# Altium PCB PCB2.PcbDoc
Units mm, origin at the board's own origin, x right, y up, seen from the top; angles counter-clockwise.
Board outline 150 x 75 mm, 2 copper layers (Top Layer, Bottom Layer); 21 components, 19 nets, 96 pads, 43 vias.
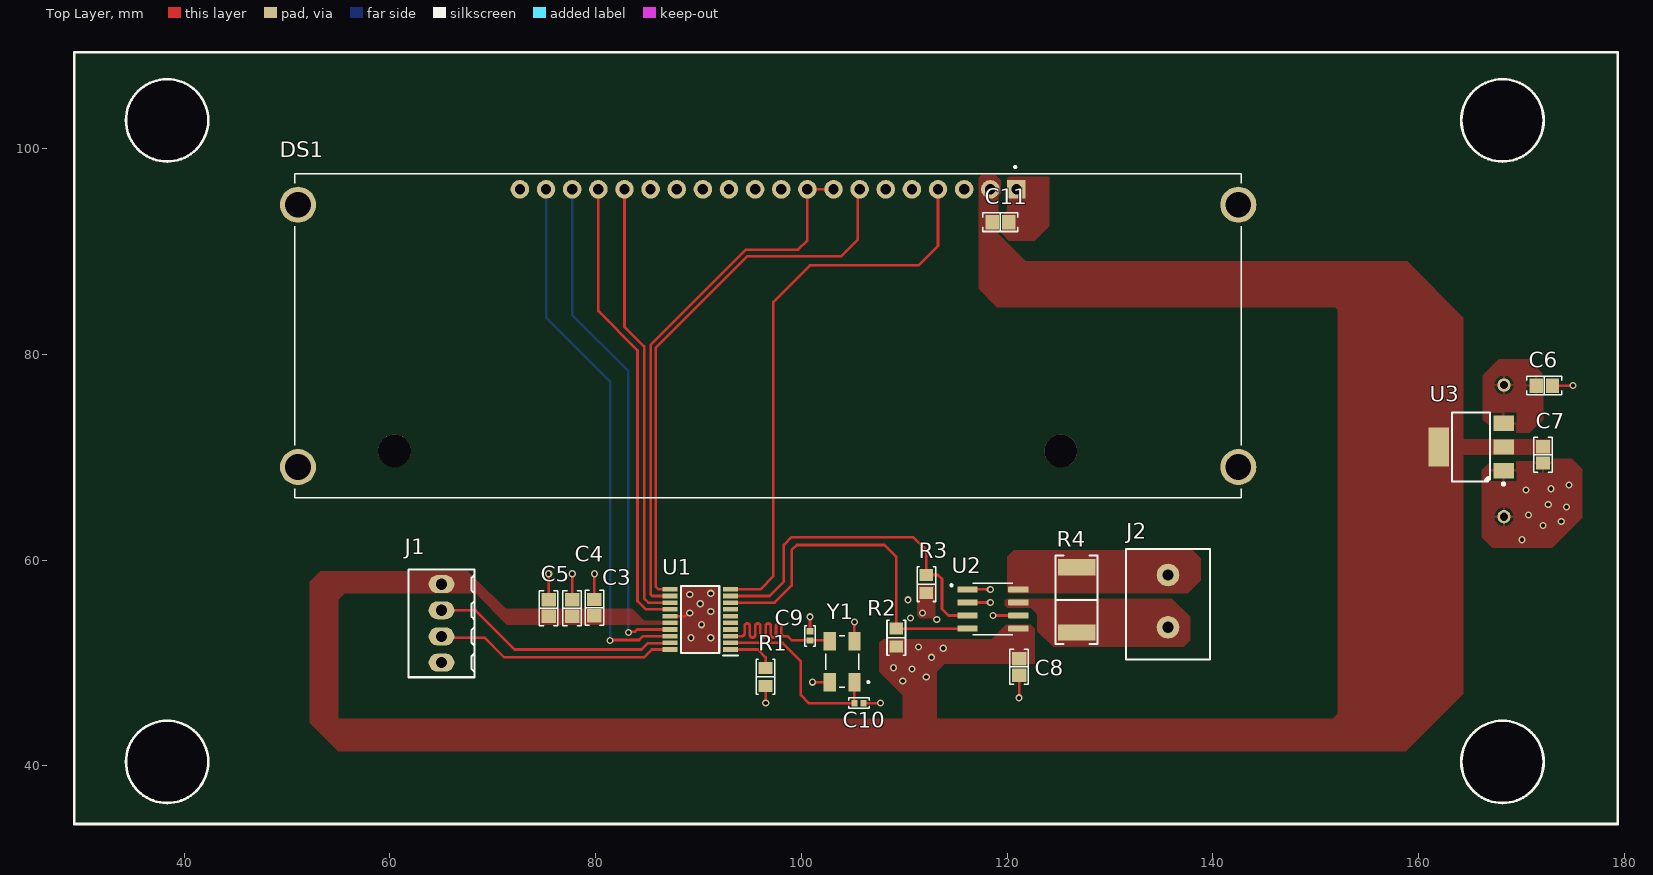
[diagram p0: Top Layer view]
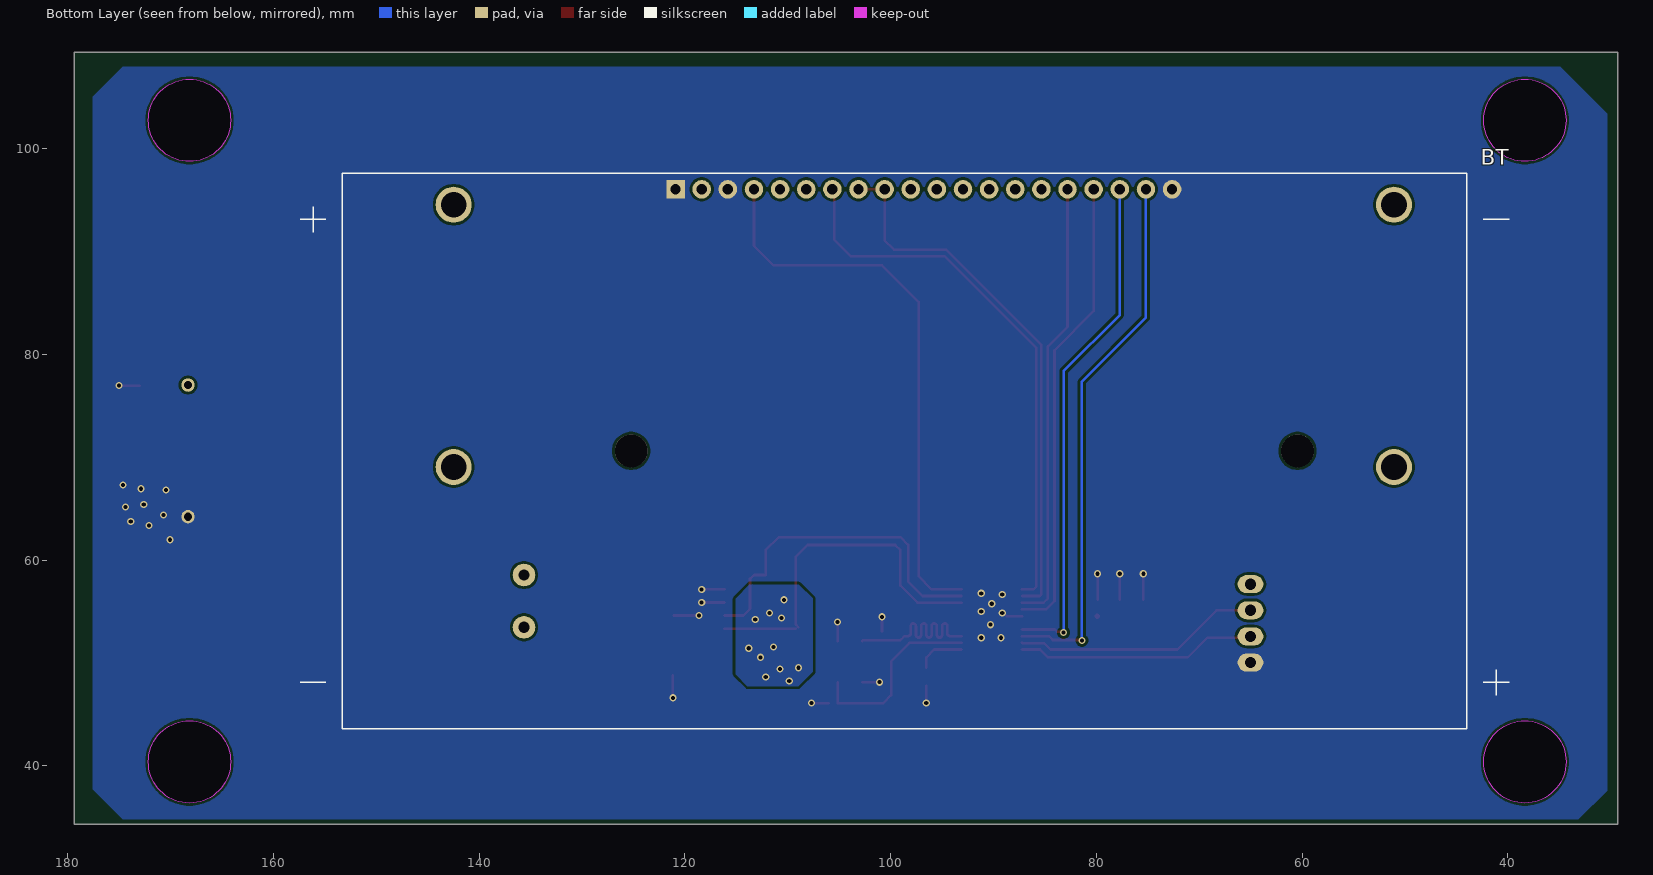
[diagram p1: Bottom Layer view, seen from below]
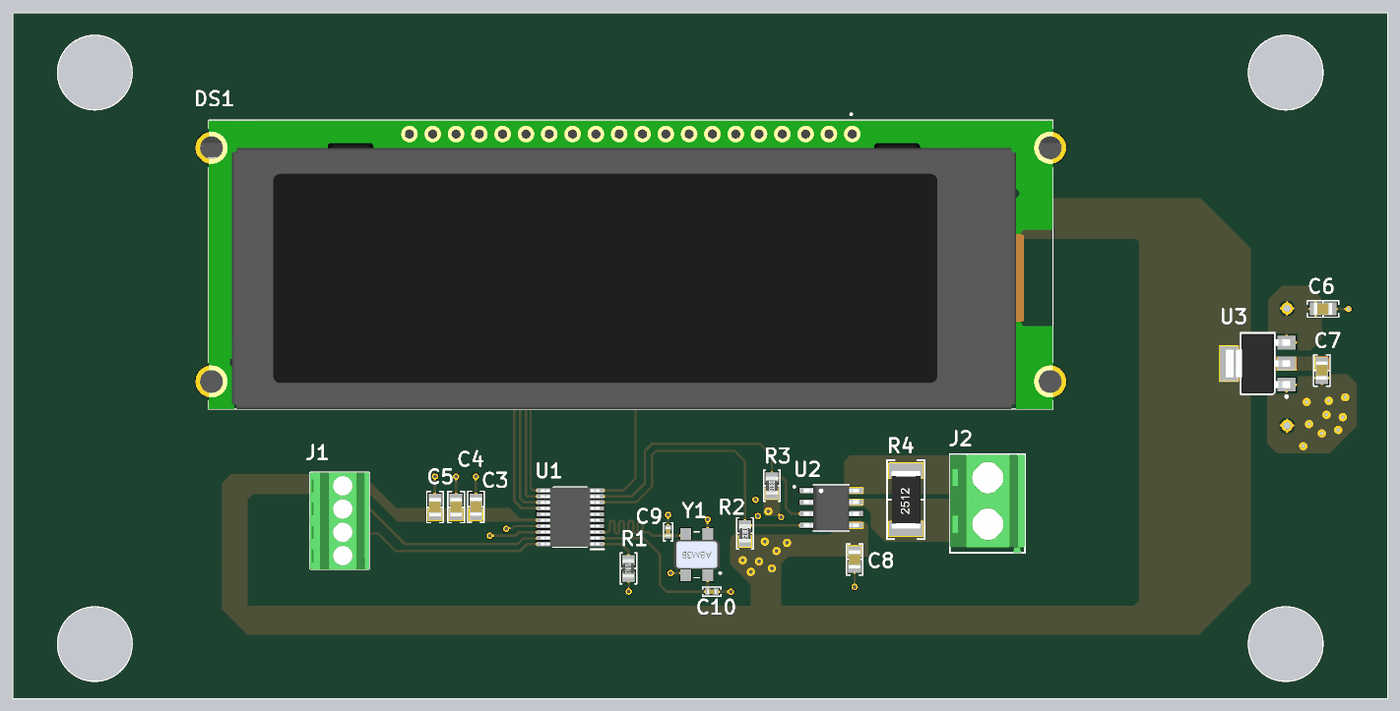
[diagram p2: 3D render of the assembled board from above, using the file's embedded part models]

## Layer stack, top to bottom
Top Solder: solder mask 0.0102, Solder Resist, Dk 3.5
Top Layer: signal copper 0.0356
Dielectric 1: dielectric 0.32, FR-4, Dk 4.8
Bottom Layer: signal copper 0.0356
Bottom Solder: solder mask 0.0102, Solder Resist, Dk 3.5

## Board outline
29.337,34.347 29.337,109.347 179.337,109.347 179.337,34.347
cut-out: 164.147,102.743 ccw(c168.147,102.743) 168.147,98.743 ccw(c168.147,102.743) 172.147,102.743 ccw(c168.147,102.743) 168.147,106.743 ccw(c168.147,102.743)
cut-out: 164.147,40.386 ccw(c168.147,40.386) 168.147,36.386 ccw(c168.147,40.386) 172.147,40.386 ccw(c168.147,40.386) 168.147,44.386 ccw(c168.147,40.386)
cut-out: 34.353,40.386 ccw(c38.353,40.386) 38.353,36.386 ccw(c38.353,40.386) 42.353,40.386 ccw(c38.353,40.386) 38.353,44.386 ccw(c38.353,40.386)
cut-out: 34.353,102.743 ccw(c38.353,102.743) 38.353,98.743 ccw(c38.353,102.743) 42.353,102.743 ccw(c38.353,102.743) 38.353,106.743 ccw(c38.353,102.743)

## Design rules (kind name [scope] priority, off if disabled: settings)
Clearance [All] p1: gap=0.254 ignorepadtopadclearanceinfootprint=TRUE
Height [All] p1: minheight=0 maxheight=100 prefheight=12.7
HoleSize [All] p1: absolutevalues=TRUE maxlimit=3.5 minlimit=0.025 maxpercent=80.000 minpercent=20.000
MinimumSolderMaskSliver [All] p1: minsoldermaskwidth=0.01
PolygonConnect [All] p1: connectstyle=Direct reliefconductorwidth=0.254 reliefentries=4 polygonreliefangle="90 Angle" airgapwidth=0.254
RoutingVias [All] p1: holewidth=0.711 width=1.27 viastyle="Through Hole" minholewidth=0.4 minwidth=0.7 maxholewidth=0.711 maxwidth=1.27
SilkToSilkClearance [All] p1: silktosilkclearance=0.01
SilkToSolderMaskClearance [IsPad] p1: minsilkscreentomaskgap=0 clearancetoexposedcopper=TRUE
SolderMaskExpansion [All] p1: expansion=0.102 istentingtop=FALSE
SupplyNets "Schematic Supply Nets_3" [InNet('3V3')] p1: voltage=0.000
SupplyNets "Schematic Supply Nets_2" [InNet('GND')] p2: voltage=0.000
SupplyNets "Schematic Supply Nets_1" [InNet('9V')] p3: voltage=0.000
Width [All] p1: maxlimit=1 minlimit=0.254 preferedwidth=0.254
25 further rules are at their usual default settings.

## Components (designator, comment, footprint, x,y, rotation, side; value= is the part's Value field where it differs from the comment)
BT "BH24CSF" BAT_BH24CSF 98.642,70.612 r0 bottom
C3 "10000 pF" "CAP 0805_2012" 79.883,55.372 r270 top
C4 "0.1 µF" "CAP 0805_2012" 77.724,55.334 r270 top
C5 "4.7 µF" "CAP 0805_2012" 75.438,55.334 r270 top
C6 "0.1 µF" "CAP 0805_2012" 172.212,76.962 r180 top
C7 "10 µF" "CAP 0805_2012" 172.085,70.231 r90 top
C8 "0.1 µF" "CAP 0805_2012" 121.158,49.619 r90 top
C9 "12 pF" "CAP 0402_1005" 100.838,52.637 r270 top
C10 "12 pF" "CAP 0402_1005" 105.596,46.101 r180 top
C11 "0.1 µF" "CAP 0805_2012" 119.342,92.837 r180 top
DS1 "NHD-0420CW-AB3" LCD_NHD-0420CW-AB3 96.774,81.788 r0 top
J1 "282834-4" "TE 282834-4" 65.024,53.848 r270 top
J2 "282837-2" "TE 282837-2" 135.636,56.007 r270 top
R1 "10k Ohms" "RES 0805_2012" 96.52,48.641 r90 top value="0 Ohms"
R2 "10k" "RES 0805_2012" 109.22,52.465 r270 top
R3 "10k" "RES 0805_2012" 112.141,57.672 r270 top
R4 "100 mOhms" "RES 2512_6432" 126.746,56.134 r90 top
U1 "STM32F030F4P6" TSSOP-20 90.17,54.229 r180 top
U2 "INA219BID" SOIC-8 118.618,55.245 r0 top
U3 "LD1117S33TR" "ST SOT-223" 165.1,70.993 r180 top
Y1 "ABM3B-8.000MHZ-D2Y-T" XTAL_ABM3B-8.000MHZ-D2Y-T 103.956,50.133 r180 top

## Footprints (in the part's own frame and the unit in brackets; to place one, negate y for a bottom-side part, rotate by r counter-clockwise, add the part's x,y. Pads: shape width x height; smd on the part's side, far side on the other; paste and mask are expansions set on the pad)
BAT_BH24CSF [mm]
  round 1.308 hole 0.8: N(69.65,6.4) P(69.65,-6.4)
  round 3.18 hole 3.18 unplated: ""(-38.19,0) ""(26.58,0)
  silkscreen extent -58.75,-26.99 58.75,26.99, body extent -54.65,-26.99 58.05,26.99, height 26.68
"CAP 0402_1005" [mm] "Chip Capacitor, 2-Leads, Body 1.02x0.51mm, IPC Medium Density"
  rect 0.6x0.64 smd: 1(-0.44,0) 2(0.44,0)
  silkscreen extent -1,-0.5 1,0.5, body extent -0.5,-0.26 0.5,0.26, height 0.52
"CAP 0805_2012" [mm] "Chip Capacitor, 2-Leads, Body 2.00x1.20mm, IPC Medium Density"
  rect 1.3x1.4 smd: 1(-0.8,0) 2(0.8,0)
  silkscreen extent -1.7,-0.9 1.7,0.9, body extent -1,-0.64 1,0.64, height 1.26
LCD_NHD-0420CW-AB3 [mm]
  rect 1.8x1.8 / inner round 1.8 / far side rect 1.8x1.8 hole 1: 1(24.13,14.25)
  round 1.8 hole 1: 2(21.59,14.25) 3(19.05,14.25) 4(16.51,14.25) 5(13.97,14.25) 6(11.43,14.25) 7(8.89,14.25) 8(6.35,14.25) 9(3.81,14.25) 10(1.27,14.25) 11(-1.27,14.25) 12(-3.81,14.25) 13(-6.35,14.25) 14(-8.89,14.25) 15(-11.43,14.25) 16(-13.97,14.25) 17(-16.51,14.25) 18(-19.05,14.25) 19(-21.59,14.25) 20(-24.13,14.25)
  round 3.5 hole 2.5: SH1(-45.7,12.75) SH2(45.7,12.75) SH3(45.7,-12.75) SH4(-45.7,-12.75)
  silkscreen extent -46,-15.75 46,16.51, body extent -46,-15.75 46,15.75, height 8.8
"RES 0805_2012" [mm] "Chip Resistor, 2-Leads, Body 2.00x1.25mm, IPC Medium Density"
  rect 1.15x1.35 smd: 1(-0.875,0) 2(0.875,0)
  silkscreen extent -1.7,-0.9 1.7,0.9, body extent -1,-0.62 1,0.63, height 0.6
"RES 2512_6432" [mm] "Chip Resistor, 2-Leads, Body 6.30x3.15mm, IPC Medium Density"
  rect 1.6x3.65 smd: 1(-3.175,0) 2(3.175,0)
  silkscreen extent -4.3,-2.05 4.3,2.05, body extent -3.15,-1.57 3.15,1.57, height 0.7
SOIC-8 [mm]
  rrect25% 1.97x0.6 smd: 1(-2.47,1.905) 2(-2.47,0.635) 3(-2.47,-0.635) 4(-2.47,-1.905) 5(2.47,-1.905) 6(2.47,-0.635) 7(2.47,0.635) 8(2.47,1.905)
  silkscreen extent -4.14,-2.52 1.95,2.52, body extent -3,-2.45 3,2.45, height 1.75
"ST SOT-223" [mm] "SOT223, 4-Leads, Body 6.50x7.00mm (avg), Pitch 2.30mm, IPC Medium Density"
  rect 2x1.5 smd: 1(-3.15,2.3) 2(-3.15,0) 3(-3.15,-2.3)
  rect 2x3.8 smd: 4(3.15,0)
  silkscreen extent -3.27,-3.35 1.85,3.72, body extent -3.52,-3.25 3.5,3.25, height 1.8
"TE 282834-4" [mm]
  oval 1.75x2.5 hole 1.1: 1(-3.81,0) 2(-1.27,0) 3(1.27,0) 4(3.81,0)
  silkscreen extent -5.24,-3.2 5.24,3.2, body extent -5.31,-3.25 5.31,3.25, height 10
"TE 282837-2" [mm] "Wire to Board Terminal Block Horizontal with Board, 2 Postions, Body 10.76x8.2 mm, Pitch 5.08mm"
  round 2.2 hole 1.1: 1(-2.54,0) 2(2.54,0)
  silkscreen extent -5.08,-4.1 5.68,4.1, body extent -5.08,-4.1 5.68,4.1, height 10.3
TSSOP-20 [mm]
  rect 1.475x0.45 smd: 1(-2.938,2.925) 2(-2.938,2.275) 3(-2.938,1.625) 4(-2.938,0.975) 5(-2.938,0.325) 6(-2.938,-0.325) 7(-2.938,-0.975) 8(-2.938,-1.625) 9(-2.938,-2.275) 10(-2.938,-2.925) 11(2.938,-2.925) 12(2.938,-2.275) 13(2.938,-1.625) 14(2.938,-0.975) 15(2.938,-0.325) 16(2.938,0.325) 17(2.938,0.975) 18(2.938,1.625) 19(2.938,2.275) 20(2.938,2.925)
  silkscreen extent -3.67,-3.25 1.85,3.5, body extent -3.2,-3.25 3.2,3.25, height 1.23
XTAL_ABM3B-8.000MHZ-D2Y-T [mm]
  rect 1.2x1.8 smd: 1(-1.2,2) 2(-1.2,-2) 3(1.2,-2) 4(1.2,2)
  silkscreen extent -2.65,-2.5 1.6,2.5, body extent -2.5,-1.6 2.5,1.6, height 1.1

## Part data
BT: "BATTERY HOLDER C 4 CELL 9V SNAP", Package=None, Availability=Unavailable, MF=MPD, MP=BH24CSF, Price=None, SnapEDA_Link=https://www.snapeda.com/parts/BH24CSF/MPD/view-part/4389082/?ref=snap
C3: library part C0805X103K1RAC3316, "CAP CER 0805 10NF 100V X7R", Device Package="0805 (2012 Metric)", Manufacturer=KEMET, Operating Temperature="-55°C ~ 125°C", Ratings=AEC-Q200, Supplier Part Number 1=399-C0805X103K1RAC3316CT-ND, Temperature Coefficient=X7R, Tolerance=±10%, Voltage - Rated=100V, Applications="Automotive, Boardflex Sensitive", Capacitance="10000 pF", ComponentLink1Description=Datasheet, ComponentLink1URL=https://api.kemet.com/component-edge/download/datasheet/C0805X103K1RAC3316.pdf, ComponentLink2Description="DigiKey Link", ComponentLink2URL=https://www.digikey.com/en/products/detail/kemet/C0805X103K1RAC3316/10315780, Features="Soft Termination", LastUpdated="9.02.2024 20:16:09", Lifecycle Status=Active, Minimum Order=1, Mounting Type="Surface Mount, MLCC", Package / Case="0805 (2012 Metric)", Packaging=TapeAndReel, Part Number=C0805X103K1RAC3316, Part Status=Active, PartId=2565, Price=0.02, Series="SMD Auto X7R VW80808", Size / Dimension="0.079\" L x 0.049\" W (2.00mm x 1.25mm)", Supplier 1=DigiKey, Thickness (Max)="0.039\" (0.98mm)"
C4 C6 C8 C11: library part C0805C104M5RACAUTO, "CAP CER 0.1UF 50V X7R 0805", Device Package="0805 (2012 Metric)", Manufacturer=KEMET, Operating Temperature="-55°C ~ 125°C", Ratings=AEC-Q200, Supplier Part Number 1=399-12977-1-ND, Temperature Coefficient=X7R, Tolerance=±20%, Voltage - Rated=50V, Applications="Automotive, Bypass, Decoupling", Capacitance="0.1 µF", ComponentLink1Description=Datasheet, ComponentLink1URL=https://api.kemet.com/component-edge/download/datasheet/C0805C104M5RACAUTO.pdf, ComponentLink2Description="DigiKey Link", ComponentLink2URL=https://www.digikey.com/en/products/detail/kemet/C0805C104M5RACAUTO/5762233, LastUpdated="9.02.2024 20:16:09", Lifecycle Status=Active, Minimum Order=1, Mounting Type="Surface Mount, MLCC", Package / Case="0805 (2012 Metric)", Packaging=TapeAndReel, Part Number=C0805C104M5RACAUTO, Part Status=Active, PartId=2568, Price=0.01, Series="SMD Auto X7R", Size / Dimension="0.079\" L x 0.049\" W (2.00mm x 1.25mm)", Supplier 1=DigiKey, Thickness (Max)="0.035\" (0.88mm)"
C5: library part C0805X475J9RACAUTO, "CAP CER 4.7UF 6.3V X7R 0805", Device Package="0805 (2012 Metric)", Manufacturer=KEMET, Operating Temperature="-55°C ~ 125°C", Ratings=AEC-Q200, Supplier Part Number 1=399-15727-1-ND, Temperature Coefficient=X7R, Tolerance=±5%, Voltage - Rated=6.3V, Applications="Automotive, Boardflex Sensitive", Capacitance="4.7 µF", ComponentLink1Description=Datasheet, ComponentLink1URL=https://api.kemet.com/component-edge/download/datasheet/C0805X475J9RACAUTO.pdf, ComponentLink2Description="DigiKey Link", ComponentLink2URL=https://www.digikey.com/en/products/detail/kemet/C0805X475J9RACAUTO/7427557, Features="Soft Termination", LastUpdated="9.02.2024 20:16:08", Lifecycle Status=Active, Minimum Order=1, Mounting Type="Surface Mount, MLCC", Package / Case="0805 (2012 Metric)", Packaging=TapeAndReel, Part Number=C0805X475J9RACAUTO, Part Status=Active, PartId=2889, Price=0.20, Series="SMD Auto X7R Flex", Size / Dimension="0.079\" L x 0.049\" W (2.00mm x 1.25mm)", Supplier 1=DigiKey, Thickness (Max)="0.057\" (1.45mm)"
C7: library part CL21Y106KPQVPNE, "CAP CER 10UF 10V X7S 0805", Device Package="0805 (2012 Metric)", Manufacturer="Samsung Electro-Mechanics", Operating Temperature="-55°C ~ 125°C", Ratings=AEC-Q200, Supplier Part Number 1=1276-6685-1-ND, Temperature Coefficient=X7S, Tolerance=±10%, Voltage - Rated=10V, Applications=Automotive, Capacitance="10 µF", ComponentLink1Description=Datasheet, ComponentLink1URL=http://www.samsungsem.com/kr/support/product-search/mlcc/CL21Y106KPQVPNE.jsp, ComponentLink2Description="DigiKey Link", ComponentLink2URL=https://www.digikey.com/en/products/detail/samsung-electro-mechanics/CL21Y106KPQVPNE/5961169, LastUpdated="9.02.2024 20:16:08", Lifecycle Status=Active, Minimum Order=1, Mounting Type="Surface Mount, MLCC", Package / Case="0805 (2012 Metric)", Packaging=TapeAndReel, Part Number=CL21Y106KPQVPNE, Part Status=Active, PartId=2979, Price=0.06, Series=CL, Size / Dimension="0.079\" L x 0.049\" W (2.00mm x 1.25mm)", Supplier 1=DigiKey, Thickness (Max)="0.055\" (1.40mm)"
C9 C10: library part CBR04C120F5GAC, "CAP CER 12PF 50V C0G/NP0 0402", Device Package="0402 (1005 Metric)", Manufacturer=KEMET, Operating Temperature="-55°C ~ 125°C", Supplier Part Number 1=399-8815-1-ND, Temperature Coefficient="C0G, NP0", Tolerance=±1%, Voltage - Rated=50V, Applications="RF, Microwave, High Frequency", Capacitance="12 pF", ComponentLink1Description=Datasheet, ComponentLink1URL=https://api.kemet.com/component-edge/download/datasheet/CBR04C120F5GAC.pdf, ComponentLink2Description="DigiKey Link", ComponentLink2URL=https://www.digikey.com/en/products/detail/kemet/CBR04C120F5GAC/3479654, Features="High Q, Low Loss, Ultra Low ESR", LastUpdated="9.02.2024 20:04:38", Lifecycle Status=Active, Minimum Order=1, Mounting Type="Surface Mount, MLCC", Package / Case="0402 (1005 Metric)", Packaging=TapeAndReel, Part Number=CBR04C120F5GAC, Part Status=Active, PartId=1750, Price=0.06, Series="CBR-SMD RF C0G", Size / Dimension="0.039\" L x 0.020\" W (1.00mm x 0.50mm)", Supplier 1=DigiKey, Thickness (Max)="0.022\" (0.55mm)"
DS1: "Character OLED;4x20;920x31.5;Char OLED Module;Blue;4/8-bit Parallel, SPI, I2C", Package=None, Check_prices=https://www.snapeda.com/parts/NHD-0420CW-AB3/Newhaven+Display+Intl/view-part/?ref=eda, MF="Newhaven Display", MP=NHD-0420CW-AB3, SnapEDA_Link=https://www.snapeda.com/parts/NHD-0420CW-AB3/Newhaven+Display+Intl/view-part/?ref=snap
J1: "TERM BLK 4P SIDE ENT 2.54MM PCB", Color=Green, Current=10A, Manufacturer="TE Connectivity AMP Connectors", Supplier Part Number 1=A98335-ND, Voltage=150V, ComponentLink1Description=Datasheet, ComponentLink1URL=https://www.te.com/commerce/DocumentDelivery/DDEController?Action=srchrtrv&DocNm=282834&DocType=Customer+Drawing&DocLang=English, ComponentLink2Description="DigiKey Link", ComponentLink2URL=http://digikey.com/product-detail/en/te-connectivity-amp-connectors/282834-4/A98335-ND/1153265, LastUpdated="15.01.2020 04:16:05", Lifecycle Status=Active, Mating Orientation="Horizontal with Board", Minimum Order=1, Mounting Type="Through Hole", Number of Levels=1, Packaging=Bulk, Part Number=282834-4, Part Status=Active, Pitch="0.100\" (2.54mm)", Positions Per Level=4, Price=2.68, Series=Buchanan, Supplier 1=DigiKey, Wire Gauge="16-30 AWG", Wire Termination="Screw - Rising Cage Clamp"
J2: "TERM BLK 2P SIDE ENT 5.08MM PCB", Color=Green, Current="13.5 A", Manufacturer="TE Connectivity AMP Connectors", Supplier Part Number 1=A113320-ND, Voltage="300 V", ComponentLink1Description=Datasheet, ComponentLink1URL=https://www.te.com/commerce/DocumentDelivery/DDEController?Action=srchrtrv&DocNm=282837&DocType=Customer+Drawing&DocLang=English, ComponentLink2Description="DigiKey Link", ComponentLink2URL=https://www.digikey.com/en/products/detail/te-connectivity-amp-connectors/282837-2/2187973, Features="Interlocking (Side)", LastUpdated="21.06.2022 15:00:23", Lifecycle Status=Active, Mating Orientation="Horizontal with Board", Minimum Order=1, Mounting Type="Through Hole", Number of Levels=1, Packaging=Tray, Part Number=282837-2, Part Status=Active, Pitch="0.200\" (5.08mm)", Positions Per Level=2, Price=0.31, Series=Buchanan, Supplier 1=DigiKey, Wire Gauge="16-28 AWG", Wire Termination="Screw - Rising Cage Clamp"
R1: library part TLRZ2ATTD, "RES 0 OHM JUMPER 0805", Device Package="0805 (2012 Metric)", Manufacturer="KOA Speer Electronics, Inc.", Operating Temperature="-55°C ~ 170°C", Ratings=AEC-Q200, Resistance="0 Ohms", Supplier Device Package=0805, Supplier Part Number 1=2019-TLRZ2ATTDCT-ND, Tolerance=Jumper, ComponentLink1Description=Datasheet, ComponentLink1URL=http://www.koaspeer.com/catimages/Products/TLRZ/TLRZ.pdf, ComponentLink2Description="DigiKey Link", ComponentLink2URL=https://www.digikey.com/en/products/detail/koa-speer-electronics-inc/TLRZ2ATTD/9845494, Composition="Metal Element", Features="Automotive AEC-Q200, Current Sense", Height - Seated (Max)="0.022\" (0.55mm)", LastUpdated="8.02.2024 21:02:39", Lifecycle Status=Active, Minimum Order=1, Number of Terminations=2, Package / Case="0805 (2012 Metric)", Packaging=TapeAndReel, Part Number=TLRZ2ATTD, Part Status=Active, PartId=27685, Price=0.08, Series=TLRZ, Size / Dimension="0.079\" L x 0.049\" W (2.00mm x 1.25mm)", Supplier 1=DigiKey
R2 R3: library part RNCS0805BKE10K0, "RES 10K OHM 0.1% 1/10W 0805", Device Package="0805 (2012 Metric)", Manufacturer="Stackpole Electronics Inc", Operating Temperature="-55°C ~ 155°C", Power (Watts)="0.1W, 1/10W", Ratings=AEC-Q200, Resistance="10 kOhms", Supplier Device Package=0805, Supplier Part Number 1=RNCS0805BKE10K0CT-ND, Temperature Coefficient=±25ppm/°C, Tolerance=±0.1%, ComponentLink1Description=Datasheet, ComponentLink1URL=https://www.seielect.com/catalog/sei-rncs_rnch.pdf, ComponentLink2Description="DigiKey Link", ComponentLink2URL=https://www.digikey.com/en/products/detail/stackpole-electronics-inc/RNCS0805BKE10K0/1800067, Composition="Thin Film", Features="Anti-Corrosive, Automotive AEC-Q200, Moisture Resistant", Height - Seated (Max)="0.026\" (0.65mm)", LastUpdated="8.02.2024 21:02:39", Lifecycle Status=Active, Minimum Order=1, Number of Terminations=2, Package / Case="0805 (2012 Metric)", Packaging=TapeAndReel, Part Number=RNCS0805BKE10K0, Part Status=Active, PartId=27713, Price=0.07, Series=RNCS, Size / Dimension="0.079\" L x 0.049\" W (2.00mm x 1.25mm)", Supplier 1=DigiKey
R4: library part CSRF2512FTR100, "RES 0.1 OHM 1% 2W 2512", Device Package="2512 (6432 Metric)", Manufacturer="Stackpole Electronics Inc", Operating Temperature="-55°C ~ 170°C", Power (Watts)=2W, Ratings=AEC-Q200, Supplier Device Package=2512, Supplier Part Number 1=CSRF2512FTR100CT-ND, Temperature Coefficient=±50ppm/°C, Tolerance=±1%, ComponentLink1Description=Datasheet, ComponentLink1URL=https://www.seielect.com/catalog/sei-csrf.pdf, ComponentLink2Description="DigiKey Link", ComponentLink2URL=http://digikey.com/product-detail/en/stackpole-electronics-inc/CSRF2512FTR100/CSRF2512FTR100CT-ND/6594080, Composition="Metal Foil", Features="Automotive AEC-Q200, Current Sense, Moisture Resistant", Height - Seated (Max)="0.037\" (0.95mm)", LastUpdated="11.04.2023 20:12:35", Lifecycle Status=Active, Minimum Order=1, Number of Terminations=2, Package / Case="2512 (6432 Metric)", Packaging=TapeAndReel, Part Number=CSRF2512FTR100, Part Status=Active, Price=0.30, Resistance="100 mOhms", Series=CSRF, Size / Dimension="0.254\" L x 0.128\" W (6.45mm x 3.25mm)", Supplier 1=DigiKey
U1: "32-Bit MCU Cortex-M0 16KB Flash TSSOP20 STM32F030F4P6, 32 bit ARM Cortex M0 Microcontroller 48MHz 16 kB Flash, 4 kB RAM, I2C 20-Pin TSSOP", Manufacturer_Name=STMicroelectronics, Mouser Part Number=511-STM32F030F4P6, Datasheet Link=http://www.st.com/web/en/resource/technical/document/datasheet/DM00088500.pdf, Geometry.Height=1.2mm, Manufacturer_Part_Number=STM32F030F4P6, Mouser Price/Stock=https://www.mouser.co.uk/ProductDetail/STMicroelectronics/STM32F030F4P6?qs=eyrSuY1LhL02tVhJ92aI6g%3D%3D
U2: "26V, 12-bit, i2c output current/voltage/power monitor", Package="SOIC-8 Texas Instruments", Availability="In Stock", Check_prices=https://www.snapeda.com/parts/INA219BID/Texas+Instruments/view-part/?ref=eda, MF="Texas Instruments", MP=INA219BID, Price=None, Purchase-URL=https://pricing.snapeda.com/search/part/INA219BID/?ref=eda, SnapEDA_Link=https://www.snapeda.com/parts/INA219BID/Texas+Instruments/view-part/?ref=snap
U3: "IC REG LINEAR 3.3V 800MA SOT223", Current - Output=800mA, Current - Quiescent (Iq)="10 mA", Manufacturer=STMicroelectronics, Operating Temperature="0°C ~ 125°C", Package / Case="TO-261-4, TO-261AA", Supplier Device Package=SOT-223, Supplier Part Number 1=497-1242-1-ND, Voltage - Output (Min/Fixed)=3.3V, Voltage - Input (Max)=15V, Voltage Dropout (Max)="1.2V @ 800mA", ComponentLink1Description=Datasheet, ComponentLink1URL=http://www.st.com/content/ccc/resource/technical/document/datasheet/99/3b/7d/91/91/51/4b/be/CD00000544.pdf/files/CD00000544.pdf/jcr:content/translations/en.CD00000544.pdf, ComponentLink2Description="DigiKey Link", ComponentLink2URL=https://www.digikey.com/en/products/detail/stmicroelectronics/LD1117S33TR/585766, LastUpdated="3.06.2024 20:14:20", Lifecycle Status=Active, Minimum Order=1, Mounting Type="Surface Mount", Number of Regulators=1, Output Configuration=Positive, Output Type=Fixed, Packaging=TapeAndReel, Part Number=LD1117S33TR, Part Status=Active, Price=0.13, Protection Features="Over Current, Over Temperature", PSRR="75dB (120Hz)", Series=-, Supplier 1=DigiKey
Y1: "Crystal 8MHz Â±20ppm (Tol) Â±30ppm (Stability) 18pF FUND 200Ohm 4-Pin CSMD T/R", Package=Package, Availability="In Stock", Check_prices=https://www.snapeda.com/parts/ABM3B-8.000MHZ-D2Y-T/Abracon+LLC/view-part/?ref=eda, MF="Abracon LLC", MP=ABM3B-8.000MHZ-D2Y-T, Price=None, Purchase-URL=https://pricing.snapeda.com/search/part/ABM3B-8.000MHZ-D2Y-T/?ref=eda, SnapEDA_Link=https://www.snapeda.com/parts/ABM3B-8.000MHZ-D2Y-T/Abracon+LLC/view-part/?ref=snap

## Via types
v1: diameter 0.7, hole 0.4, Top Layer to Bottom Layer, 43 vias

## Nets (pads, with @x,y where several pads share a name; then routed paths per layer and width w, separated by ;. In a path a pad name is that pad's centre, name@x,y a point inside that pad or via, vN(x,y) a via of type N, cw(c..) or ccw(c..) an arc to the next point about the centre after c; other vN are vias at no path point)
3V3: C3.2 C4.2 C5.2 C7.2 C8.2 C11.2 DS1.2 J1.1 R2.2 R3.2 U1.16 U2.5 U3.2 U3.4 | length 0.2
  Top Layer w0.5: C3.2 C3.2@79.916,54.539 ; DS1.2@118.237,95.911 DS1.2
  other v1: 109.855,48.26 112.141,48.641 110.744,49.403 108.966,49.53 112.649,50.546 113.792,51.435 111.379,51.562 113.157,54.229 110.617,54.356 111.76,54.864 110.363,56.134
9V: BT.P C6.2 U3.3
BOOT0: R1.2 U1.1 | length 4.8
  Top Layer w0.254: U1.1 95.762,51.304 96.52,50.546 R1.2
BS0: DS1.17 U1.14 | length 45.1
  Top Layer w0.254: DS1.17 80.264,84.201 84.074,80.391 84.074,56.007 84.877,55.204 U1.14
BS1: DS1.18 U1.17 | length 49.5
  Top Layer w0.254: v1(83.185,52.959) 83.27,53.044 83.833,53.044 84.043,53.254 U1.17
  Bottom Layer w0.254: DS1.18 77.724,83.82 83.185,78.359 v1(83.185,52.959)
BS2: DS1.19 U1.18 | length 52.4
  Top Layer w0.254: v1(81.407,52.197) 81.438,52.228 84.232,52.228 84.608,52.604 U1.18
  Bottom Layer w0.254: DS1.19 75.184,83.566 81.407,77.343 v1(81.407,52.197)
GND: BT.N C3.1 C4.1 C5.1 C6.1 C7.1 C8.1 C9.1 C10.1 C11.1 DS1.1 DS1.3 DS1.20 J1.4 R1.1 U1.15 U2.1 U2.2 U2.6 U3.1 Y1.2 Y1.4 | length 29
  Top Layer w0.254: C5.1 v1(75.438,58.674) ; C4.1 v1(77.724,58.674) ; C3.1 v1(79.883,58.674) ; U1.15 88.723,54.554 89.033,54.864 v1(89.154,54.864) ; R1.1 96.533,47.753 v1(96.533,46.118) ; C9.1 v1(100.838,54.483) ; v1(101.092,48.133) Y1.4 ; Y1.2 v1(105.156,53.975) ; C10.1 v1(107.696,46.101) ; U2.2 v1(118.364,55.88) ; U2.1 v1(118.364,57.15) ; v1(118.618,54.61) U2.6 ; v1(121.158,46.609) C8.1 ; C6.1 v1(175.006,76.962)
  other v1: 89.281,52.451 91.186,52.451 90.297,53.721 91.186,54.991 90.17,55.753 89.154,56.642 91.186,56.769 170.053,61.976 172.085,63.373 173.863,63.754 170.688,64.389 174.371,65.151 172.593,65.405 170.434,66.802 172.847,66.929 174.625,67.31
PA2: R2.1 U1.8 U2.4 | length 34.8
  Top Layer w0.254: U1.8 97.383,55.854 99.06,57.531 99.06,60.96 99.568,61.468 108.077,61.468 109.22,60.325 109.22,53.721 R2.1@108.966,53.467 ; R2.1 U2.4
PA3: R3.1 U1.9 U2.3 | length 33.8
  Top Layer w0.254: U1.9 96.89,56.504 98.298,57.912 98.298,61.468 99.06,62.23 110.871,62.23 112.141,60.96 R3.1 113.284,58.547 113.665,58.166 113.665,55.245 114.3,54.61 U2.3
PA4: DS1.4 U1.10 | length 55.1
  Top Layer w0.254: U1.10 96.008,57.154 97.282,58.428 97.282,85.09 100.838,88.646 111.379,88.646 113.284,90.551 DS1.4
PA5: DS1.7 U1.11 | length 53.7
  Top Layer w0.254: U1.11 86.102,57.154 85.852,57.404 85.852,80.645 94.742,89.535 103.886,89.535 105.47,91.119 105.47,95.844 DS1.7
PA6: DS1.8 DS1.9 U1.12 | length 53.2
  Top Layer w0.254: U1.12 85.493,56.504 85.344,56.653 85.344,80.899 94.615,90.17 99.695,90.17 100.584,91.059 DS1.9 DS1.8
PA7: DS1.16 U1.13 | length 43.3
  Top Layer w0.254: DS1.16 82.804,82.677 84.709,80.772 84.709,56.261 85.116,55.854 U1.13
PA13: J1.2 U1.19 | length 24.1
  Top Layer w0.254: J1.2 68.326,55.118 72.136,51.308 84.455,51.308 85.057,51.91 87.188,51.91 U1.19
PA14: J1.3 U1.20 | length 23.4
  Top Layer w0.254: J1.3 65.151,52.451 69.215,52.451 71.12,50.546 84.709,50.546 85.467,51.304 U1.20
PH0: C10.2 U1.2 Y1.1 | length 18.4
  Top Layer w0.254: U1.2 98.16,51.954 99.949,50.165 99.949,46.863 100.711,46.101 C10.2 Y1.1
PH1: C9.2 U1.3 Y1.3 | length 18.9
  Top Layer w0.254: U1.3 94.107,52.604 94.234,52.604 ccw(c94.234,52.858) 94.488,52.858 94.488,53.592 cw(c94.742,53.592) 94.996,53.592 94.996,52.716 ccw(c95.25,52.716) 95.504,52.716 95.504,53.592 cw(c95.758,53.592) 96.012,53.592 96.012,52.716 ccw(c96.266,52.716) 96.52,52.716 96.52,53.592 cw(c96.774,53.592) 97.028,53.592 97.028,52.716 ccw(c97.282,52.716) 97.536,52.716 97.536,53.592 cw(c97.79,53.592) 98.044,53.592 98.044,52.858 ccw(c98.298,52.858) 98.298,52.604 98.653,52.604 99.015,52.242 99.06,52.197 C9.2 102.692,52.197 Y1.3
VIN+: J2.1 R4.2 U2.8
VIN-: J2.2 R4.1 U2.7
pads on no net: BT. DS1.5 DS1.6 DS1.10 DS1.11 DS1.12 DS1.13 DS1.14 DS1.15 DS1.SH1 DS1.SH2 DS1.SH3 DS1.SH4 U1.4 U1.5 U1.6 U1.7

## Polygon pours and split planes (outlines as drawn)
3V3 on Top Layer "3V3_L01_P022" (solid, pour order 22): 147.066,89.027 158.877,89.027 164.338,83.566 164.338,46.99 158.75,41.402 135.128,41.402 135.128,44.577 152.146,44.577 152.146,84.582 147.436,84.582
GND on Top Layer "GND_L01_P020" (solid, pour order 20): 88.392,57.404 88.392,51.054 91.948,51.054 92.075,51.181 92.075,57.404
3V3 on Top Layer "3V3_L01_P018" (solid, pour order 18): 110.363,52.324 118.491,52.324 119.888,53.721 122.301,53.721 122.682,53.34 122.682,49.911 113.919,49.911 112.958,48.95
3V3 on Top Layer "3V3_L01_P017" (solid, pour order 17): 109.855,43.942 109.855,46.863 107.569,49.149 107.569,51.943 107.95,52.324 110.871,52.324 113.157,50.038 113.157,43.942
3V3 on Top Layer "3V3_L01_P012" (solid, pour order 12): 111.379,57.404 111.252,57.277 111.252,54.61 111.506,54.356 112.776,54.356 113.03,54.61 113.03,57.531 112.903,57.658 111.506,57.658 111.252,57.404
3V3 on Top Layer "3V3_L01_P011" (solid, pour order 11): 160.909,50.038 152.273,41.402 54.991,41.402 52.197,44.196 52.197,57.912 53.213,58.928 67.564,58.928 68.453,58.039 71.247,55.245 83.566,55.245 84.709,54.102 88.011,54.102 88.011,53.721 84.709,53.721 71.374,53.721 68.326,56.769 55.626,56.769 54.991,56.134 54.991,44.577 151.638,44.577 161.332,54.271
VIN+ on Top Layer "VIN+_L01_P008" (solid, pour order 8): 120.015,56.896 120.142,56.769 137.541,56.769 138.811,58.039 138.811,60.198 138.049,60.96 120.65,60.96 120.015,60.325
VIN- on Top Layer "VIN-_L01_P010" (solid, pour order 10): 120.015,56.261 133.096,56.261 136.017,56.261 137.795,54.483 137.795,52.197 137.16,51.562 124.46,51.562 122.936,53.086 122.936,54.737 122.301,55.372 120.015,55.372 119.761,55.626 119.761,56.134
GND on Top Layer "GND_L01_P006" (solid, pour order 6): 120.142,97.282 120.015,97.155 120.015,93.98 119.507,93.472 119.507,91.694 120.142,91.059 122.682,91.059 124.079,92.456 124.079,97.282
3V3 on Top Layer "3V3_L01_P005" (solid, pour order 5): 164.153,82.481 157.607,89.027 121.793,89.027 119.126,91.694 119.126,95.377 119.38,95.631 119.38,96.901 118.872,97.409 117.475,97.409 117.221,97.155 117.221,86.36 118.999,84.582 151.892,84.582 163.23,73.244
3V3 on Top Layer "3V3_L01_P002" (solid, pour order 2): 172.847,70.358 172.847,70.231 163.957,70.231 162.814,69.088 160.909,69.088 160.909,72.898 163.195,72.898 164.338,71.755 172.72,71.755 172.847,71.628
GND on Top Layer "GND_L01_P003" (solid, pour order 3): 171.323,69.85 171.069,69.596 167.005,69.596 166.116,68.707 166.116,62.23 167.132,61.214 172.974,61.214 175.895,64.135 175.895,68.834 174.879,69.85
9V on Top Layer "9V_L01_P000" (solid, pour order 0): 167.767,79.502 166.243,77.978 166.243,73.66 167.513,72.39 170.815,72.39 172.085,73.66 172.085,78.105 170.688,79.502
3V3 on Bottom Layer "3V3_L02_P013" (solid, pour order 13): 111.477,57.619 108.927,57.619 107.569,56.261 107.569,49.149 108.966,47.752 113.919,47.752 115.062,48.895 115.062,56.261 113.676,57.647
3V3 on Bottom Layer "3V3_L02_P015" (solid, pour order 15): 106.299,57.658 113.411,57.658 114.173,56.896 114.173,50.419 113.284,49.53 107.315,49.53 105.537,51.308 105.537,57.023
GND on Bottom Layer "GND_L02_P014" (solid, pour order 14): 30.353,103.378 34.925,107.95 174.625,107.95 177.546,105.029 177.546,37.719 174.625,34.798 33.147,34.798 30.353,37.592

## Silkscreen, mask and mechanical layers (free items; w line width, h text height)
Top Overlay:
  circle w0.254: c168.147,102.743 r4
  circle w0.254: c168.147,40.386 r4
  circle w0.254: c38.353,40.386 r4
  circle w0.254: c38.353,102.743 r4
  lines w0.254: 29.337,34.347 179.337,34.347 179.337,109.347 29.337,109.347 29.337,34.347